# Altium PCB 16-channel-EEG-PCB.PcbDoc (part 2 of 3)
Units mm, origin at the board's own origin, x right, y up, seen from the top; angles counter-clockwise.
Board outline 86.9 x 82.1 mm, 4 copper layers (L1 (Signal), L2 (GND), L3 (PWR), L4 (Signal)), stack 1.57 mm thick; 128 components, 125 nets, 524 pads, 134 vias.
Unrouted connection lines stored in the file: 4.
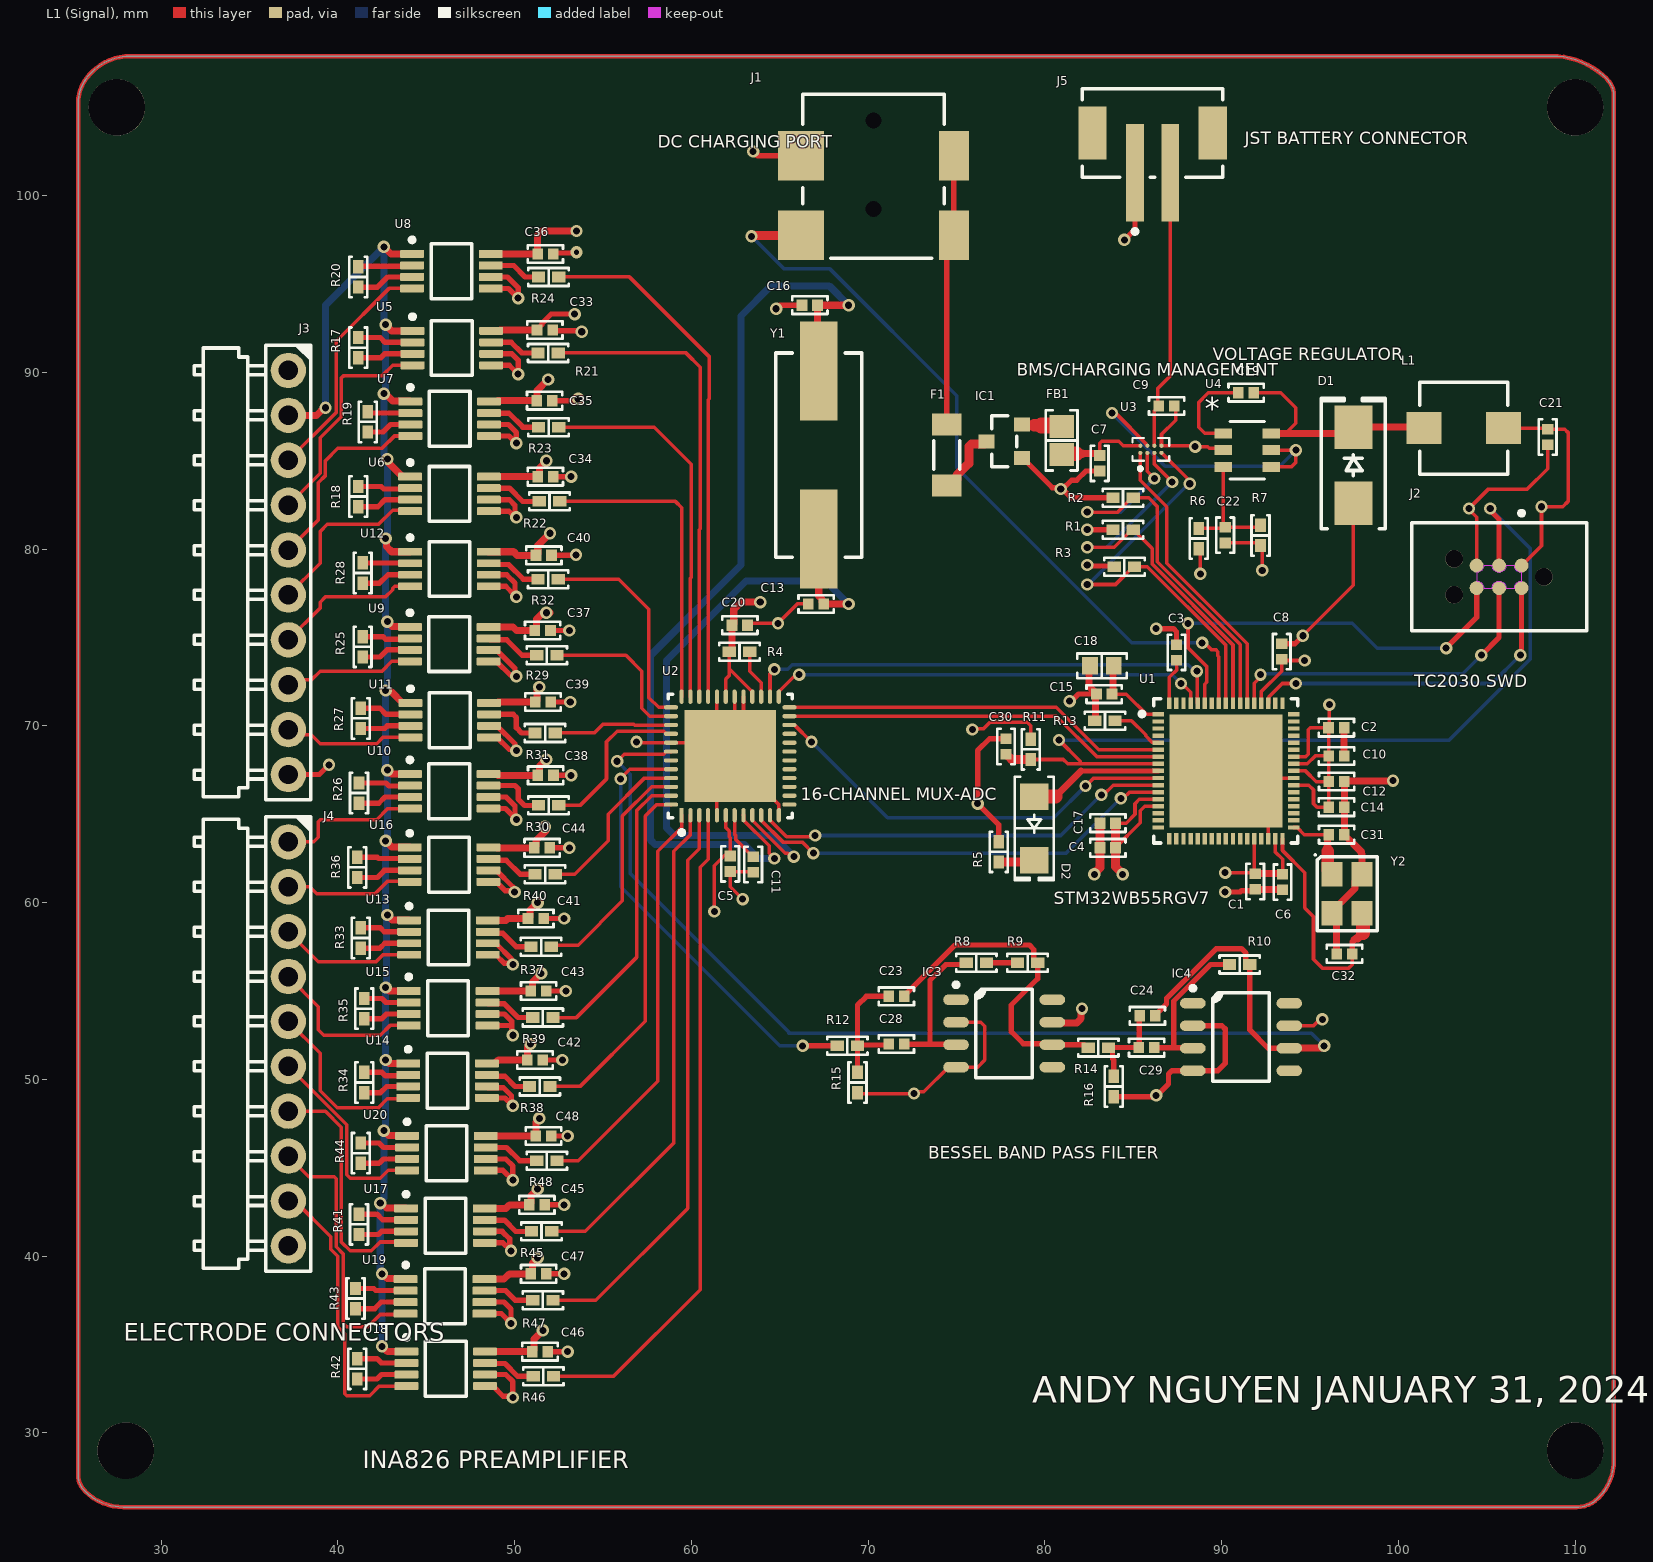
[diagram p0: L1 (Signal) view]

## Part data (continued)
R17 R18 R19 R20 R21 R22 R23 R24 R25 R26 R27 R28 R29 R30 R31 R32 R33 R34 R35 R36 R37 R38 R39 R40 R41 R42 R43 R44 R45 R46 R47 R48: library part ERA-2AKD100X, "RES SMD 10 OHM 0.5% 1/16W 0402", Device Package="0402 (1005 Metric)", manufacturer="Panasonic Electronic Components", Operating Temperature="-55°C ~ 155°C", Power (Watts)="0.063W, 1/16W", Ratings=AEC-Q200, Supplier Device Package=0402, Supplier Part Number 1=P10DDCT-ND, Temperature Coefficient=±100ppm/°C, Tolerance=±0.5%, componentlink1description=Datasheet, componentlink1url=https://industrial.panasonic.com/cdbs/www-data/pdf/RDM0000/AOA0000C307.pdf, componentlink2description="DigiKey Link", componentlink2url=https://www.digikey.com/en/products/detail/panasonic-electronic-components/ERA-2AKD100X/1706054, Composition="Thin Film", Features="Automotive AEC-Q200", Height - Seated (Max)="0.016\" (0.40mm)", lastupdated="1/29/2024 8:27:58 PM", Lifecycle Status=Active, Minimum Order=1, Number of Terminations=2, Package / Case="0402 (1005 Metric)", packaging=TapeAndReel, Part Number=ERA-2AKD100X, Part Status=Active, partid=3168, price=0.02, Resistance="10 Ohms", series=ERA-2A, Size / Dimension="0.039\" L x 0.020\" W (1.00mm x 0.50mm)", Supplier 1=DigiKey
U1: library part CMP-12160-000001-1, "ULTRA-LOW-POWER DUAL CORE ARM CO", Ambient Temperature Range High=+105°C, Ambient Temperature Range Low=-40°C, manufacturer=STMicroelectronics, Max Frequency=2480MHz, Max Junction Temp=+125°C, Max Power Dissipation=425mW, Max Supply Voltage=3.6V, Min Supply Voltage=1.71V, Package=VFQFPN-68-B029, Receiving Current=4.5-7.9mA, Temperature="-40°C to +125°C", Automotive=No, Bandwidth=75MHz, Category=IC, componentlink2description=Datasheet, componentlink2url=https://www.st.com/resource/en/datasheet/stm32wb55rg.pdf, Data Rate=2Mbits/s, Device Class L1="Integrated Circuits (ICs)", Device Class L2="RF Semiconductors and Devices", Device Class L3=Transceivers, Digikey Description="ULTRA-LOW-POWER DUAL CORE ARM CO", Height=1mm, Interface=I2C,SPI,UART,USART,USB, Ipc Land Pattern Name=QFN40P800X800X90-68, Lead Free=Yes, Manufacturer Part Number=STM32WB55RGV6, Mouser Description="MCU 32-Bit STM32WB55 ARM Cortex M4 RISC 1MB Flash 1.7V to 3.6V 68-Pin VFQFPN Tray", Number Of Adc Channels=19, Number Of Gpio=49, Octopart=https://octopart.com/stm32wb55rgv6-stmicroelectronics-98750848, RoHS=TRUE, Sensitivity=-96dBm, Standoff Height=0mm, Temperature Range High=+125°C, Temperature Range Low=-40°C
U2: library part CMP-0003-00953-2, "IC ADC 24BIT SIGMA-DELTA 48VQFN", Case/Package=VQFN, Dual Supply Voltage=2.5V, Max Dual Supply Voltage=2.65V, Max Operating Temperature=105°C, Max Power Dissipation=62mW, Max Supply Voltage=5.25V, Min Dual Supply Voltage=2.15V, Min Operating Temperature=-40°C, Min Supply Voltage=4.75V, Min Supply Voltage (DC)=2.7V, Operating Supply Voltage=5V, Package Quantity=2500, Power Consumption=42mW, Contact Plating=Gold, Conversion Rate=125KS/s, Differential Nonlinearity=1LSB, Interface=SPI, Lead Free="Lead Free", Max Supply Voltage (DC)=5.25V, Number of A/D Converters=1, Number of Bits=24, Number of Converters=1, Number of Inputs=16, Number of Pins=48, packaging="Tape and Reel", Polarity=Bipolar, Power Dissipation=42mW, Radiation Hardening=No, Resolution=24b, RoHS Compliant=Yes, Sampling Rate=125KS/s, Supply Type=Single
U3: "1-A Li-ion IÂ²C programmable charger with regulated power path in WCSP package", Package=None, Availability="In Stock", Check_prices=https://www.snapeda.com/parts/BQ25180YBGR/Texas+Instruments/view-part/?ref=eda, MF="Texas Instruments", MP=BQ25180YBGR, price=None, Purchase-URL=https://pricing.snapeda.com/search/part/BQ25180YBGR/?ref=eda, SnapEDA_Link=https://www.snapeda.com/parts/BQ25180YBGR/Texas+Instruments/view-part/?ref=snap
U4: "No Description Available", Mfr_Name="Monolithic Power Systems", Copyright="Copyright (C) 2024 Ultra Librarian. All rights reserved.", Digi-Key_Part_Number_1=1589-1893-2-ND, Digi-Key_Part_Number_2=1589-1893-1-ND, Digi-Key_Part_Number_3=1589-1893-6-ND, Manufacturer_Part_Number=MP2451DJ-LF-Z, RefDes=RefDes, Type=DEV
U5 U6 U7 U8 U9 U10 U11 U12 U13 U14 U15 U16 U17 U18 U19 U20: library part CMP-0944-00060-2, "Precision, 200-uA Supply Current, 36-V Supply Instrumentation Amplifier, -40 to 125 degC, 8-pin SOP (DGK8), Green (RoHS & no Sb/Br)", Input Bias Current (+/-)(Max)(nA)=65, manufacturer="Texas Instruments", Quiescent Current (+/-)(Typ)(mA)=0.2, CMRR(Min)(dB)=84, Code_JEDEC=MO-187, componentlink1description="Manufacturer URL", componentlink1url=http://www.ti.com/, componentlink2description=Datasheet, componentlink2url=http://www.ti.com/general/docs/lit/getliterature.tsp?genericPartNumber=INA826&fileType=pdf, ComponentLink3Description="Package Specification", ComponentLink3URL=http://www.ti.com/litv/pdf/mpds028d, DatasheetVersion=SBOS562E, Eco-Plan="Green (RoHS & no Sb/Br)", Gain(V/V)="1 to 1000", Input Offset (+/-)(Max)(uV)=150, Input Offset Drift (+/-)(Max)(uV/Degrees Celsius)=2, Mounting Technology="Surface Mount", Noise at 1kHz(Typ)(nV/rt(Hz))=18, Non-Linearity (+/-)(Max)(%)=0.0005, Number of Channels=1, Output Offset (+/-)(Max)(uV)=700, Output Offset Drift (+/-)(Max)(uV/Degrees Celsius)=10, PackageDescription="8-Pin Thin Small Outline, Body 3 x 3 mm, Pitch 0.65 mm", PackageReference=DGK0008A, PackageVersion="4073329/E, 05/2006", PartNumber=INA826AIDGKR, SubFamily="Single Supply", Vs(Max)(V)=36, Vs(Min)(V)=2.7
Y1: library part ABLS-16.000MHZ-B2-T, "CRYSTAL 16.0000MHZ 18PF SMD", ESR (Equivalent Series Resistance)="40 Ohms", Frequency Stability=±50ppm, Frequency Tolerance=±20ppm, Load Capacitance=18pF, manufacturer="Abracon LLC", Operating Mode=Fundamental, Operating Temperature="-20°C ~ 70°C", Package / Case=HC-49/US, Supplier Part Number 1=535-9071-1-ND, componentlink1description=Datasheet, componentlink1url=https://abracon.com/Resonators/abls.pdf, componentlink2description="DigiKey Link", componentlink2url=https://www.digikey.com/en/products/detail/abracon-llc/ABLS-16-000MHZ-B2-T/675266, Frequency="16 MHz", Height - Seated (Max)="0.165\" (4.20mm)", lastupdated="1/29/2024 9:32:47 PM", Lifecycle Status=Active, Minimum Order=1, Mounting Type="Surface Mount", packaging=TapeAndReel, Part Number=ABLS-16.000MHZ-B2-T, Part Status=Active, partid=132, price=0.12, series=ABLS, Size / Dimension="0.449\" L x 0.185\" W (11.40mm x 4.70mm)", Supplier 1=DigiKey, Type="MHz Crystal"
Y2: library part ABM8G-24.000MHZ-4Y-T3, "CRYSTAL 24.0000MHZ 10PF SMD", Device Package="4-SMD, No Lead", ESR (Equivalent Series Resistance)="60 Ohms", Frequency Stability=±30ppm, Load Capacitance=10pF, manufacturer="Abracon LLC", Operating Mode=Fundamental, Operating Temperature="-10°C ~ 60°C", Supplier Part Number 1=535-10913-1-ND, componentlink1description=Datasheet, componentlink1url=https://abracon.com/Resonators/ABM8G.pdf, componentlink2description="DigiKey Link", componentlink2url=http://digikey.com/product-detail/en/abracon-llc/ABM8G-24.000MHZ-4Y-T3/535-10913-1-ND/2624246, Frequency=24MHz, Frequency Tolerance=±30ppm, Height - Seated (Max)="0.039\" (1.00mm)", lastupdated="3/19/2020 10:36:25 PM", Lifecycle Status=Active, Minimum Order=1, Mounting Type="Surface Mount", Package / Case="4-SMD, No Lead", packaging=TapeAndReel, Part Number=ABM8G-24.000MHZ-4Y-T3, Part Status=Active, partid=361, price=0.39, series=ABM8G, Size / Dimension="0.126\" L x 0.098\" W (3.20mm x 2.50mm)", Supplier 1=DigiKey, Type="MHz Crystal"

## Free pads (board coordinates)
  round 3.2 hole 3.2: MH(27.5,105) MH(28,29) MH(110,29) MH(110,105)

## Via types
v1: diameter 0.7, hole 0.4, L1 (Signal) to L4 (Signal), 133 vias
v2: diameter 0.7, hole 0.3, L1 (Signal) to L4 (Signal), 1 vias

## Nets (pads, with @x,y where several pads share a name; then routed paths per layer and width w, separated by ;. In a path a pad name is that pad's centre, name@x,y a point inside that pad or via, vN(x,y) a via of type N, cw(c..) or ccw(c..) an arc to the next point about the centre after c; other vN are vias at no path point)
+3V3: C1.1 C2.1 C3.1 C4.1 C5.2 C6.1 C8.1 C10.1 C12.1 C14.1 C15.1 C17.1 C18.1 C20.2 C21.2 C22.1 C33.2 C34.2 C35.2 C36.2 C37.2 C38.2 C39.2 C40.2 C41.2 C42.2 C43.2 C44.2 C45.2 C46.2 C47.2 C48.2 IC3.7 IC4.7 J2.1 L1.2 R4.1 R7.1 R11.2 U1.1 U1.13 U1.14 U1.30 U1.33 U1.41 U1.43 U1.44 U1.45 U1.55 U1.68 U2.6 U2.28 U2.31 U5.8 U6.8 U7.8 U8.8 U9.8 U10.8 U11.8 U12.8 U13.8 U14.8 U15.8 U16.8 U17.8 U18.8 U19.8 U20.8 | length 151.4
  L1 (Signal) w0.2: v1(61.3,59.5) 61.3,62.08 61.95,62.73 C5.2@61.98,62.7 ; U2.6@61.95,64.949 61.95,64.25 62.15,64.05 62.15,63.726 62.2,63.676 C5.2@62.2,62.64 ; U2.31@61.95,71.651 61.95,72.65 62.15,72.85 62.15,73.236 ; R4.1@62.15,74.2 62.15,73.236 ; U2.28@63.45,71.651 63.45,71.936 62.15,73.236 ; v1(75.9,69.8) 75.95,69.85 76.55,69.85 76.9,70.2 79,70.2 79.2,70 R11.2@79.2,69.25 ; C15.1@83.8,71.8 84.6,71.8 85.749,70.651 U1.1@86.421,70.651 ; C15.1@83.85,71.85 C15.1@83.851,71.851 ; C4.1@84,63.1 84,63.12 85.4,64.52 85.4,65.2 85.651,65.451 U1.14@86.421,65.451 ; C17.1@84,64.5 84.6,64.5 85.1,65 85.1,65.6 85.351,65.851 U1.13@86.421,65.851 ; U1.68@87.046,71.276 87.046,72.746 87.45,73.15 C3.1@87.45,73.72 ; v1(90.2,61.7) 91.84,61.7 C1.1@91.846,61.694 ; C22.1@90.2,80.35 92.05,80.35 R7.1@92.2,80.2 92.3,80.1 v1(92.3,78.8) ; U1.30@91.821,63.601 U1.30@91.846,63.626 C1.1@91.846,61.694 ; C1.1@91.9,61.64 C1.1@91.846,61.694 ; U1.55@92.246,71.276 92.246,71.946 93.4,73.1 C8.1@93.4,73.76 93.46,73.7 v1(94.7,73.7) ; U1.33@93.046,63.626 93.046,62.854 93.45,62.45 C6.1@93.45,61.6 C6.1@93.41,61.64 ; IC4.7@93.825,53.035 95.2,53.035 95.565,53.4 v1(95.7,53.4) ; U1.41@94.071,66.651 94.932,66.651 95.2,66.383 95.2,65.6 95.4,65.4 C14.1@96.06,65.4 96.07,65.41 C12.1@96.07,66.85 ; U1.43@94.071,67.451 94.749,67.451 95.35,66.85 C12.1@96.07,66.85 ; U1.44@94.071,67.851 94.851,67.851 95.3,68.3 C10.1@96.06,68.3 ; U1.45@94.071,68.251 94.751,68.251 94.9,68.4 94.9,69.783 95.017,69.9 C2.1@96.05,69.9 ; v1(96.1,71.2) 96.1,69.95 C2.1@96.05,69.9 ; L1.2@105.95,86.85 108.39,86.85 C21.2@108.45,86.79 109.41,86.79 109.6,86.6 109.6,82.7 109.3,82.4 v1(108.1,82.4) 108.1,80.2 J2.1@106.97,79.07 ; C2.1@96.05,69.9 96.05,68.31 C10.1@96.06,68.3 ; C10.1@96.06,68.3 96.07,68.29 C12.1@96.07,66.85
  L1 (Signal) w0.3: C33.2@51.27,92.4 51.27,92.42 51.55,92.7 51.55,92.774 52.076,93.3 v1(53.4,93.3)
  L1 (Signal) w0.4: U19.8@48.288,38.702 48.29,38.7 49.4,38.7 49.7,39 C47.2@50.92,39 51.02,39.1 51.02,39.62 v1(51.3,39.9) ; U17.8@48.308,42.702 48.31,42.7 49.5,42.7 49.7,42.9 C45.2@50.82,42.9 50.92,43 50.92,43.42 v1(51.3,43.8) ; U18.8@48.328,34.602 48.329,34.601 50.999,34.601 C46.2@51,34.6 51.1,34.7 51.1,35.3 v1(51.6,35.8) ; U20.8@48.368,46.802 U20.8@48.368,46.802 51.199,46.801 C48.2@51.2,46.8 51.2,47.6 v1(51.4,47.8) ; U14.8@48.431,50.902 48.881,50.902 49.079,51.1 C42.2@50.72,51.1 50.72,51.82 v1(50.9,52) ; U15.8@48.464,55.002 48.465,55.001 C43.2@50.92,55 C43.2@50.92,55 51.02,55.1 51.02,55.52 v1(51.5,56) ; U13.8@48.484,59.002 48.486,59 49.5,59 49.6,59.1 C41.2@50.76,59.1 50.86,59.2 50.86,59.56 v1(51.3,60) ; U16.8@48.517,63.126 48.967,63.126 48.993,63.1 C44.2@51.12,63.1 51.22,63.2 51.22,63.52 v1@51.8,64.1 ; U10.8@48.525,67.275 48.975,67.275 49.05,67.2 C38.2@51.32,67.2 51.42,67.3 51.42,67.72 v1(51.8,68.1) ; U9.8@48.529,75.602 49.913,75.602 50.116,75.4 C37.2@51.15,75.4 51.25,75.5 51.25,76.05 51.6,76.4 v1(51.8,76.4) v1@52,76.4 ; U12.8@48.539,79.852 49.948,79.852 50.15,79.65 C40.2@51.21,79.65 51.31,79.75 51.31,80.21 v1(52,80.9) ; U6.8@48.542,84.102 U6.8@48.542,84.102 51.299,84.101 C34.2@51.3,84.1 51.4,84.2 51.4,84.6 v1(51.8,85) ; U7.8@48.552,88.352 49.002,88.352 49.05,88.4 C35.2@51.26,88.4 51.26,88.96 v1(51.9,89.6) ; U11.8@48.559,71.302 49.009,71.302 49.057,71.35 C39.2@51.17,71.35 51.27,71.45 51.27,72.07 v1(51.4,72.2) ; U8.8@48.65,96.7 C36.2@51.3,96.7 51.3,97.766 51.534,98 v1(53.5,98) ; U5.8@48.672,92.352 49.122,92.352 49.17,92.4 C33.2@51.27,92.4 ; R4.1@62.15,74.2 62.2,74.2 62.3,74.3 C20.2@62.3,75.7 62.4,75.8 62.4,76.6 62.8,77 v1(63.9,77) ; IC3.7@80.425,53.235 80.46,53.2 81.808,53.2 82.043,53.434 82.043,53.943 v1(82.1,54) ; C15.1@83.8,71.8 83.85,71.85 83.85,73.35 C18.1@83.9,73.4 ; C1.1@91.9,61.64 C6.1@93.41,61.64
  L1 (Signal) w0.5: C17.1@84,64.5 C4.1@84,63.1 84,62.03 84.4,61.63 v1(84.4,61.6)
  other v1: 51.7,64.3